# EAGLE board arduinoven (EAGLE 5.11)
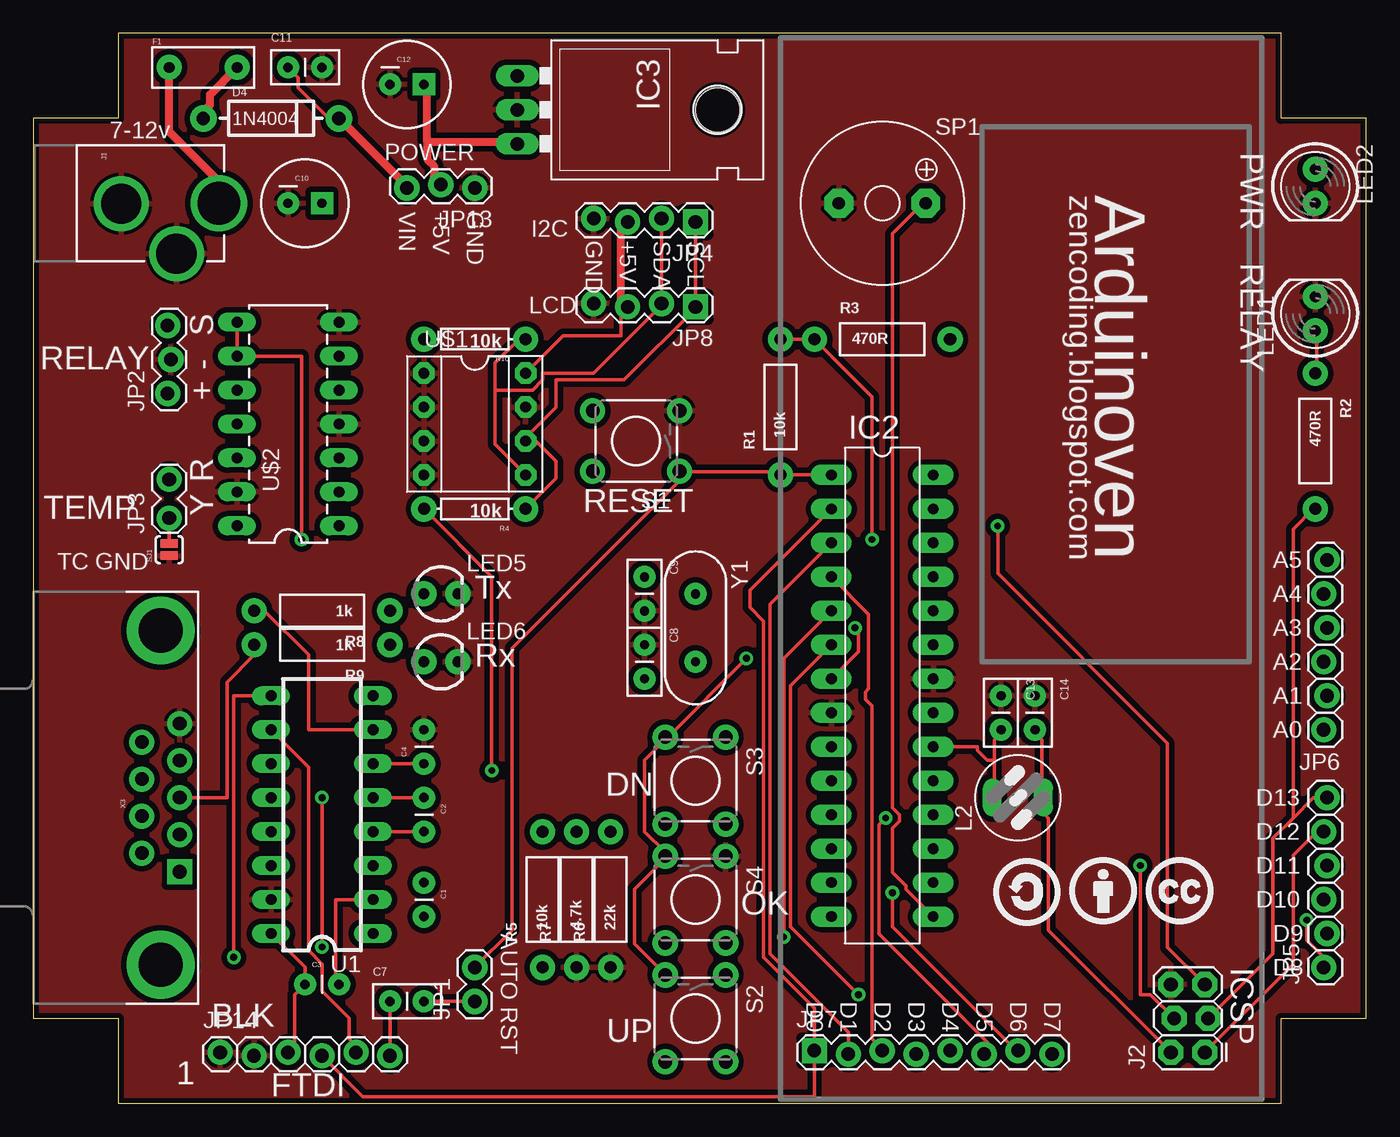
[diagram p0: board, top side]
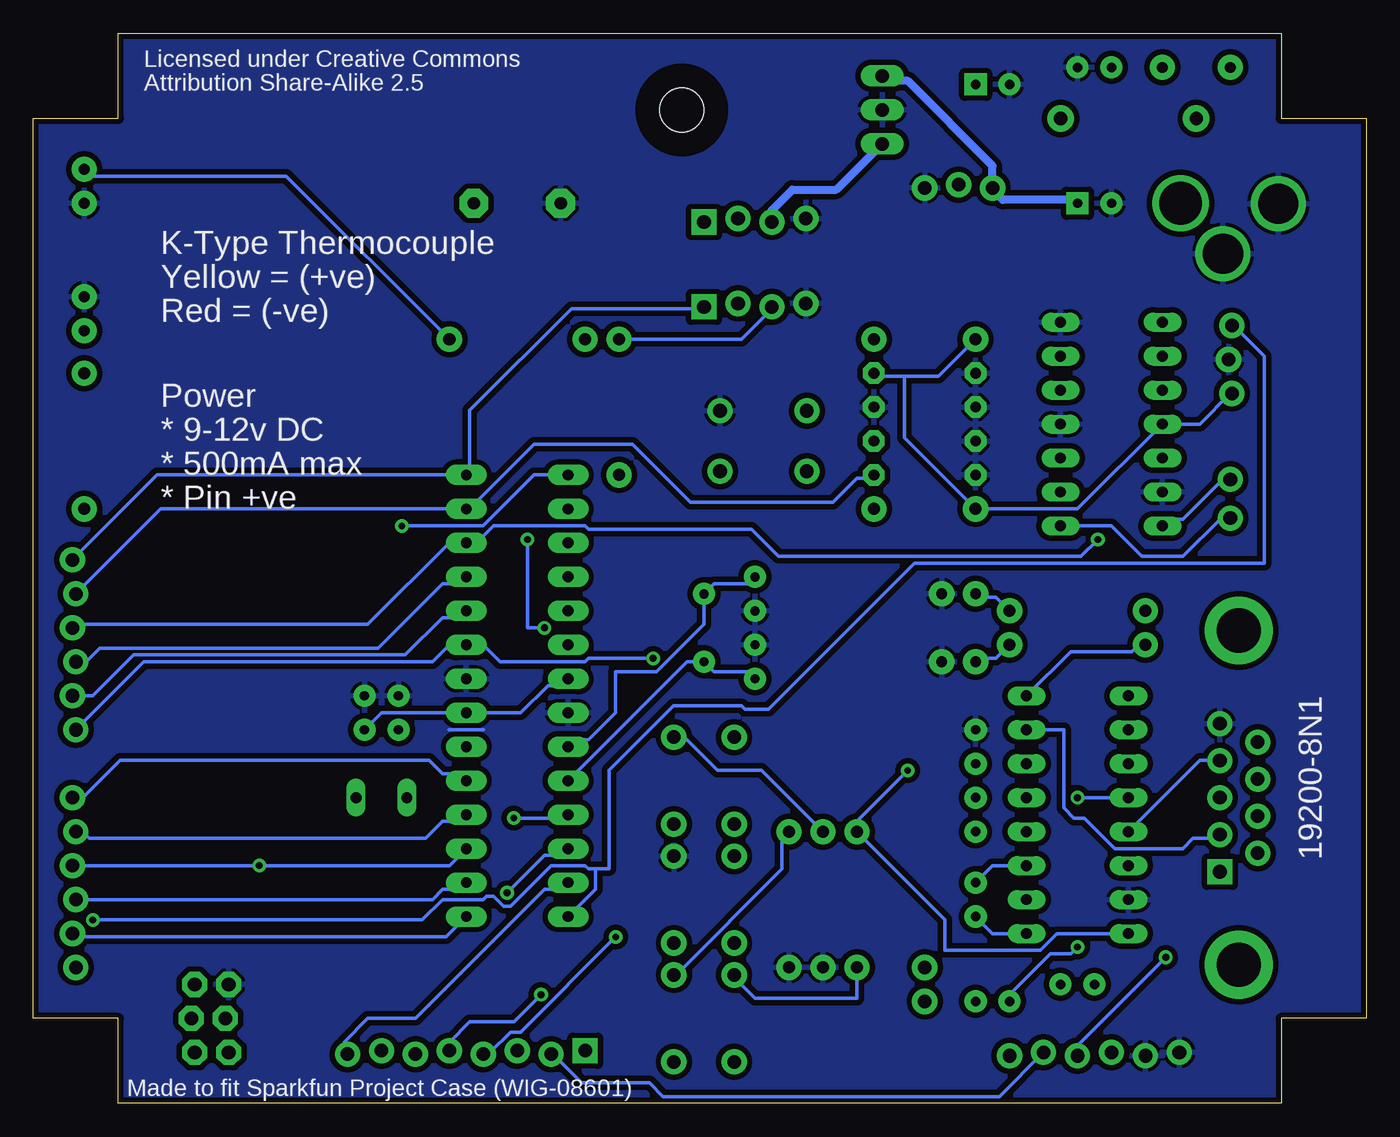
[diagram p1: board, bottom side, seen from below]

Size 99.69 x 80.01 mm. Coordinates in mm from the lower left corner, seen from the top.
Outline: 0,6.35 6.35,6.35 6.35,0 93.34,0 93.34,6.35 99.69,6.35 99.69,73.66 93.34,73.66 93.34,80.01 6.35,80.01 6.35,73.66 0,73.66 0,6.35
Copper layers (1*16): Top 0.035mm / dielectric 1.5mm / Bottom 0.035mm
Design rules "SparkFun *": minimum track width 10mil, minimum drill 20mil, track to track 10mil, track to pad 10mil, pad to pad 10mil, via to via 10mil, smd to smd 8mil, copper to edge 10mil, drill to drill 8mil, minimum pad ring 12mil, minimum via ring 10mil, stop-mask expansion 4mil, vias tented up to drill 25mil, thermal gap 10mil
Net classes: 1 power: width 0.61 mm

## Footprints (pad centres in the part's own frame; a part is rotated, then mirrored left to right if it is on the bottom)
CAP-PTH-SMALL = drill 0.7 pad 1.651 round: 1 0,0; 2 2.54,0
CAP-PTH-SMALL2 = drill 0.7 pad 1.651 round: 1 0,0; 2 2.54,0
CPOL-RADIAL-100UF-25V = drill 0.7 pad 1.651 square: 1 1.27,0 | drill 0.7 pad 1.651 round: 2 -1.27,0
DIODE-1N4001 = drill 1 pad 1.981 round: A -5.08,0; C 5.08,0
PTC = drill 0.8 pad 1.88 round: P$1 -2.54,0; P$2 2.54,0
ATMEL_DIL28-3 = drill 0.813 pad 1.524 long: 1 -16.51,-3.81; 2 -13.97,-3.81; 3 -11.43,-3.81; 4 -8.89,-3.81; 5 -6.35,-3.81; 6 -3.81,-3.81; 7 -1.27,-3.81; 8 1.27,-3.81; 9 3.81,-3.81; 10 6.35,-3.81; 11 8.89,-3.81; 12 11.43,-3.81; 13 13.97,-3.81; 14 16.51,-3.81; 15 16.51,3.81; 16 13.97,3.81; 17 11.43,3.81; 18 8.89,3.81; 19 6.35,3.81; 20 3.81,3.81; 21 1.27,3.81; 22 -1.27,3.81; 23 -3.81,3.81; 24 -6.35,3.81; 25 -8.89,3.81; 26 -11.43,3.81; 27 -13.97,3.81; 28 -16.51,3.81
TO-220-ALT = drill 1.016 long: GND 0,-3.81; IN -2.54,-3.81; OUT 2.54,-3.81 | hole 3.302: 0,11.176
POWER_JACK_PTH_LOCK = drill 2.997 pad 4.115 round: GND 0.025,6.557; GNDBREAK 3.762,10.7 | drill 3.2 pad 4.115 round: PWR 0,13.878
2X3_LOCK = drill 1.016 pad 1.88 octagon: 1 0,0; 2 0,2.54; 3 2.54,-0.254; 4 2.54,2.286; 5 5.08,0; 6 5.08,2.54
1X02 = drill 1.016 pad 1.88 round: 1 0,0; 2 2.54,0
1X03_LOCK = drill 1.016 pad 1.88 round: 1 0,0.127; 2 2.54,-0.127; 3 5.08,0.127
1X02_LOCK = drill 1.016 pad 1.88 round: 1 -0.178,0; 2 2.718,0
1X04_LOCK = drill 1.016 pad 1.88 square: 1 0,0.127 | drill 1.016 pad 1.88 round: 2 2.54,-0.127; 3 5.08,0.127; 4 7.62,-0.127
1X06_LOCK = drill 1.016 pad 1.88 round: 1 0,0; 2 2.54,-0.254; 3 5.08,0; 4 7.62,-0.254; 5 10.16,0; 6 12.7,-0.254
1X08_LOCK = drill 1.016 pad 1.88 square: 1 0,0.127 | drill 1.016 pad 1.88 round: 2 2.54,-0.127; 3 5.08,0.127; 4 7.62,-0.127; 5 10.16,0.127; 6 12.7,-0.127; 7 15.24,0.127; 8 17.78,-0.127
82114R = drill 0.813 long: 1 0,1.905; 2 0,-1.905
LED5MM = drill 0.813 pad 1.88 round: A -1.27,0; K 1.27,0
LED3MM = drill 0.813 pad 1.88 round: A -1.27,0; K 1.27,0
AXIAL-0.4 = drill 0.9 pad 1.88 round: P$1 -5.08,0; P$2 5.08,0
AXIAL-0.3 = drill 0.9 pad 1.88 round: P$1 -3.81,0; P$2 3.81,0
TACTILE-PTH = drill 1.016 pad 1.88 round: 1 -3.251,2.261; 2 3.251,2.261; 3 -3.251,-2.261; 4 3.251,-2.261
SJ_2S-NO = smd 0.635 x 1.27: 1 -0.45,0; 2 0.45,0
KSS1201 = drill 0.914 pad 2.159 octagon: + 3.251,0; - -3.251,0
DIL16 = drill 0.813 long: 1 -8.89,-3.81; 2 -6.35,-3.81; 3 -3.81,-3.81; 4 -1.27,-3.81; 5 1.27,-3.81; 6 3.81,-3.81; 7 6.35,-3.81; 8 8.89,-3.81; 9 8.89,3.81; 10 6.35,3.81; 11 3.81,3.81; 12 1.27,3.81; 13 -1.27,3.81; 14 -3.81,3.81; 15 -6.35,3.81; 16 -8.89,3.81
DIL08 = drill 0.813 pad 1.6 octagon: 1 -3.81,-3.81; 2 -1.27,-3.81; 3 1.27,-3.81; 4 3.81,-3.81; 5 3.81,3.81; 6 1.27,3.81; 7 -1.27,3.81; 8 -3.81,3.81
DIL14 = drill 0.813 long: 1 -8.89,-3.81; 2 -6.35,-3.81; 3 -3.81,-3.81; 4 -1.27,-3.81; 5 1.27,-3.81; 6 3.81,-3.81; 7 6.35,-3.81; 8 6.35,3.81; 9 3.81,3.81; 10 1.27,3.81; 11 -1.27,3.81; 12 -3.81,3.81; 13 -6.35,3.81; 14 -8.89,3.81
DB9 = drill 1.016 pad 1.88 square: 1 -5.54,-1.42 | drill 1.016 pad 1.88 round: 2 -2.77,-1.42; 3 0,-1.42; 4 2.77,-1.42; 5 5.54,-1.42; 6 -4.15,1.42; 7 -1.38,1.42; 8 1.38,1.42; 9 4.15,1.42 | drill 3.302 pad 5.08 round: G1 -12.5,0; G2 12.5,0
HC49US = drill 0.7 pad 1.651 round: 1 -2.54,0; 2 2.54,0

## Placement (x,y rotation side)
C1  0.1uF  [CAP-PTH-SMALL]  29.21,16.51 270 top
C2  0.1uF  [CAP-PTH-SMALL]  29.21,22.86 270 top
C3  0.1uF  [CAP-PTH-SMALL]  20.32,8.89 0 top
C4  0.1uF  [CAP-PTH-SMALL]  29.21,25.4 90 top
C7  0.1uF  [CAP-PTH-SMALL2]  26.67,7.62 0 top
C8  22pF  [CAP-PTH-SMALL2]  45.72,34.29 270 top
C9  22pF  [CAP-PTH-SMALL2]  45.72,39.37 270 top
C10  100uF  [CPOL-RADIAL-100UF-25V]  20.32,67.31 0 top
C11  0.1uF  [CAP-PTH-SMALL2]  19.05,77.47 0 top
C12  100uF  [CPOL-RADIAL-100UF-25V]  27.94,76.2 0 top
C13  0.1uF  [CAP-PTH-SMALL2]  72.39,30.48 270 top
C14  0.1uF  [CAP-PTH-SMALL2]  74.93,30.48 270 top
D4  1N4004  [DIODE-1N4001]  17.78,73.66 0 top
F1  500mA  [PTC]  12.7,77.47 0 top
IC2  ATMEGA328p  [ATMEL_DIL28-3]  63.5,30.48 270 top
IC3  7805  [TO-220-ALT]  40.01,74.3 270 top
J1  POWER_JACK  [POWER_JACK_PTH_LOCK]  0,67.31 270 top
J2  ICSP  [2X3_LOCK]  87.63,3.81 90 top
JP1  AUTO RST  [1X02]  33.02,7.62 90 top
JP2  RELAY  [1X03_LOCK]  10.16,53.09 90 top
JP3  TEMP  [1X02_LOCK]  10.16,43.94 90 top
JP4  I2C  [1X04_LOCK]  49.53,66.04 180 top
JP5  D8-D13  [1X06_LOCK]  96.52,10.16 90 top
JP6  A0-A5  [1X06_LOCK]  96.52,27.94 90 top
JP7  D0-D7  [1X08_LOCK]  58.42,3.81 0 top
JP8  LCD  [1X04_LOCK]  49.53,59.69 180 top
JP13  [1X03_LOCK]  33.02,68.58 180 top
JP14  FTDI  [1X06_LOCK]  13.97,3.81 0 top
L2  100uH  [82114R]  73.66,22.86 90 top
LED1  RELAY  [LED5MM]  95.89,59.05 90 top
LED2  PWR  [LED5MM]  95.89,68.58 270 top
LED5  Tx  [LED3MM]  30.48,38.1 0 top
LED6  Rx  [LED3MM]  30.48,33.02 0 top
R1  10k  [AXIAL-0.4]  55.88,52.07 90 top
R2  470R  [AXIAL-0.4]  95.89,49.53 270 top
R3  470R  [AXIAL-0.4]  63.5,57.15 0 top
R4  10k  [AXIAL-0.3]  33.02,44.45 180 top
R5  10k  [AXIAL-0.4]  38.1,15.24 90 top
R6  22k  [AXIAL-0.4]  43.18,15.24 90 top
R7  4.7k  [AXIAL-0.4]  40.64,15.24 90 top
R8  1k  [AXIAL-0.4]  21.59,36.83 180 top
R9  1k  [AXIAL-0.4]  21.59,34.29 180 top
R10  10k  [AXIAL-0.3]  33.02,57.15 180 top
S1  RESET  [TACTILE-PTH]  45.09,49.53 180 top
S2  UP  [TACTILE-PTH]  49.53,6.35 270 top
S3  DOWN  [TACTILE-PTH]  49.53,24.13 270 top
S4  ENTER  [TACTILE-PTH]  49.53,15.24 270 top
SJ1  GND_TC  [SJ_2S-NO]  10.16,41.4 90 top
SP1  PIEZO  [KSS1201]  63.5,67.31 0 top
U1  MAX232PTH  [DIL16]  21.59,21.59 90 top
U$1  24LC256  [DIL08]  33.02,50.8 270 top
U$2  AD595  [DIL14]  19.05,52.07 90 top
U$4  [BY]  77.47,13.34 0 top
U$5  [CC]  83.19,13.34 0 top
U$6  [SA]  71.75,13.34 0 top
X3  DB9-Female  [DB9]  9.53,22.86 90 top
Y1  16MHz  [HC49US]  49.53,35.56 270 top

## Library data of the parts
C1-C4 C7-C14 D4 F1 IC3 J1 JP1-JP8 JP13 JP14 LED1 LED2 LED5 LED6 R1-R10 S1-S4 SJ1 U1 X3 Y1 = SparkFun
IC2 J2 L2 U$1 U$2 U$4-U$6 = zencoding
SP1 = buzzer; OC_FARNELL: unknown; OC_NEWARK: unknown

## Nets
ADC0/PC0: IC2.23 JP6.1 R5.P$1 S2.3 S3.3 S4.3
ADC1/PC1: IC2.24 JP6.2
ADC2/PC2: IC2.25 JP6.3
ADC3/PC3: IC2.26 JP6.4 U$2.8 U$2.9
AIN0/PD6: IC2.12 JP7.7
AIN1/PD7: IC2.13 JP7.8
GND: C4.2 C8.1 C9.2 C10.2 C11.2 C12.2 C13.1 C14.1 IC2.8 IC2.22 IC3.GND J1.GND J1.GNDBREAK J2.6 JP2.2 JP4.4 JP8.4 JP13.1 JP14.1 JP14.2 LED1.K LED2.K LED5.K LED6.K R6.P$1 R7.P$1 S1.3 S4.1 SJ1.1 SP1.- U1.15 U$1.1 U$1.2 U$1.3 U$1.4 U$1.7 U$2.4 U$2.7 U$2.13 X3.5
I2C/SCL: IC2.28 JP4.1 JP6.6 JP8.1 R4.P$1 U$1.6
I2C/SDA: IC2.27 JP4.2 JP6.5 JP8.2 R10.P$1 U$1.5
ICP/PB0: IC2.14 JP2.3 JP5.1
INT0/PD2: IC2.4 JP7.3
INT1/PD3: IC2.5 JP7.4
M8RESET: C7.1 JP14.6 U1.12
M8RXD: IC2.2 JP7.1 JP14.4 U1.9
M8TXD: IC2.3 JP7.2 JP14.5 U1.10
MISO/PB4: IC2.18 J2.1 JP5.5
MOSI/PB3: IC2.17 J2.4 JP5.4
N$1: LED1.A R2.P$1
N$2: IC2.1 J2.5 JP1.2 R1.P$1 S1.1
N$5: LED2.A R3.P$2
N$6: R6.P$2 S2.1
N$7: R7.P$2 S3.1
N$9: F1.P$1 J1.PWR
N$10: D4.A F1.P$2
N$11: C1.2 U1.1
N$19: C7.2 JP1.1
N$20: C8.2 IC2.10 Y1.2
N$21: C9.1 IC2.9 Y1.1
N$23: C13.2 IC2.20 L2.1
N$24: C1.1 U1.3
N$25: C2.2 U1.4
N$26: C2.1 U1.5
N$27: C4.1 U1.6
N$28: C3.2 U1.2
N$29: U1.13 X3.4
N$30: R9.P$2 U1.8 X3.3
N$31: R8.P$2 U1.7 X3.2
N$32: LED5.A R8.P$1
N$33: LED6.A R9.P$1
OC1/PB1: IC2.15 JP5.2 SP1.+
SCK/PB5: IC2.19 J2.3 JP5.6 R2.P$2
SS/PB2: IC2.16 JP5.3
T0/PD4: IC2.6 JP7.5
T1/PD5: IC2.11 JP7.6
TC/+IN: JP3.1 SJ1.2 U$2.1
TC/-IN: JP3.2 U$2.14
VCC: C3.1 C12.1 C14.2 IC2.7 IC2.21 IC3.OUT J2.2 JP2.1 JP4.3 JP8.3 JP13.2 JP14.3 L2.2 R1.P$2 R3.P$1 R4.P$2 R5.P$2 R10.P$2 U1.16 U$1.8 U$2.11
VIN: C10.1 C11.1 D4.C IC3.IN JP13.3

## Tracks (layer width: path | path; a pad name or v marks a point on that pad's centre or on a via)
ADC0/PC0  (via drill 0.51)
  Top 0.254: S2.3 47.24,9.65 44.96,11.94 44.96,16 47.24,18.29 S4.3 47.24,18.54 47.24,18.8 45.72,20.32 45.72,25.65 47.24,27.18 S3.3 47.5,27.43 v53.34,33.27
  Bottom 0.254: R5.P$1 38.1,7.87 45.72,7.87 47.24,9.4 S2.3 | v53.34,33.27 58.17,33.27 58.42,33.02 64.77,33.02 66.04,34.29 IC2.23 68.58,34.29 69.85,33.02 91.44,33.02 JP6.1
ADC1/PC1
  Bottom 0.254: IC2.24 67.82,36.32 69.09,36.32 71.88,33.53 92.2,33.53 95.25,30.48 JP6.2
ADC2/PC2
  Bottom 0.254: IC2.25 67.82,38.86 69.09,38.86 73.91,34.04 94.74,34.04 95.76,33.02 JP6.3
ADC3/PC3  (via drill 0.51)
  Top 0.254: U$2.8 U$2.9 20.07,55.88 v20.07,42.16
  Bottom 0.254: JP6.4 96.52,35.81 74.68,35.81 68.58,41.91 IC2.26 66.55,41.91 65.28,43.18 58.42,43.18 58.17,42.93 45.97,42.93 43.94,40.89 21.34,40.89 v20.07,42.16
AIN0/PD6  (via drill 0.51)
  Top 0.254: v64.26,15.75 64.26,13.21 73.66,3.81 JP7.7
  Bottom 0.254: IC2.12 60.2,18.54 61.47,18.54 v64.26,15.75
AIN1/PD7
  Bottom 0.254: IC2.13 60.2,16 61.47,16 71.12,6.35 74.68,6.35 76.45,4.57 76.45,3.81 76.2,3.81 JP7.8
GND
  Bottom 0.254: 66.03,27.94 66.04,27.94 68.58,27.94 68.59,27.94
  pour Bottom (isolate 0.406): 0,73.66 6.35,73.66 6.35,80.01 93.34,80.01 93.34,73.66 99.69,73.66 99.69,6.35 93.34,6.35 93.34,0 6.35,0 6.35,6.35 0,6.35
  pour Top (isolate 0.406): 0,73.66 6.35,73.66 6.35,80.01 93.34,80.01 93.34,73.66 99.69,73.66 99.69,6.35 93.34,6.35 93.34,0 6.35,0 6.35,6.35 0,6.35
I2C/SCL
  Top 0.254: JP4.1 JP8.1 49.53,59.44 44.2,54.1 39.12,54.1 39.12,52.07 37.08,50.04 | 37.08,50.04 36.83,49.78 U$1.6 37.08,50.04 | R4.P$1 39.12,46.74 39.12,48.01 37.08,50.04
  Bottom 0.254: JP6.6 90.42,46.99 IC2.28 67.06,46.99 67.06,51.82 59.44,59.44 49.53,59.44 JP8.1
I2C/SDA
  Top 0.254: JP4.2 JP8.2 46.99,59.69 41.91,54.61 38.1,54.61 38.1,54.1 37.34,53.34 34.54,53.34 | U$1.5 34.54,49.28 34.54,53.34 | 34.54,53.34 34.54,55.37 36.32,57.15 R10.P$1
  Bottom 0.254: JP6.5 90.17,44.45 IC2.27 67.06,44.45 62.23,49.28 54.86,49.28 50.55,44.96 39.88,44.96 38.1,46.74 37.08,46.74 U$1.5
ICP/PB0  (via drill 0.51)
  Top 0.254: v95.25,13.72 95.25,12.19 96.52,10.92 JP5.1
  Bottom 0.254: IC2.14 57.66,16 57.66,17.53 | 57.66,17.53 58.17,17.53 58.42,17.78 60.96,17.78 64.01,14.73 64.52,14.73 65.28,15.49 65.79,15.49 66.04,15.24 69.09,15.24 70.61,13.72 v95.25,13.72 | 57.66,17.53 56.64,17.53 56.64,24.89 51.82,29.72 46.74,29.72 46.48,29.46 44.7,29.46 33.78,40.39 7.62,40.39 7.62,55.88 9.91,58.17 JP2.3
INT0/PD2
  Top 0.254: IC2.4 62.48,36.58 62.48,30.99 62.23,30.73 62.23,30.23 62.74,29.72 62.74,4.83 63.5,4.06 JP7.3
INT1/PD3  (via drill 0.51)
  Top 0.254: IC2.5 56.13,33.27 v56.13,12.45
  Bottom 0.254: v56.13,12.45 63.25,5.33 64.01,5.33 65.53,3.81 66.04,3.81 JP7.4
M8RESET  (via drill 0.51)
  Top 0.254: v21.59,11.68 v21.59,22.86 | JP14.6 C7.1
  Bottom 0.254: v21.59,22.86 U1.12 | v21.59,11.68 22.1,11.18 23.62,11.18 26.67,8.13 C7.1
M8RXD  (via drill 0.51)
  Top 0.254: U1.9 14.99,30.48 v14.99,10.92 | IC2.2 53.59,38.35 53.59,37.08 54.61,36.07 54.61,10.92 58.42,7.11 JP7.1 58.42,0.51 24.64,0.51 JP14.4
  Bottom 0.254: v14.99,10.92 21.59,4.32 JP14.4
M8TXD
  Top 0.254: U1.10 20.57,25.15 20.57,11.43 21.59,10.41 21.59,8.38 23.62,6.35 23.62,4.83 24.13,4.32 JP14.5 | IC2.3 55.12,37.34 55.12,11.18 60.96,5.33 JP7.2
  Bottom 0.254: JP14.5 27.43,0.51 52.58,0.51 53.59,1.52 58.67,1.52 60.71,3.56 60.96,3.56 JP7.2
MISO/PB4
  Top 0.254: J2.1 94.23,10.41 94.23,18.54 96.01,20.32 JP5.5
  Bottom 0.254: IC2.18 67.82,21.08 69.09,21.08 70.36,19.81 95.5,19.81 96.01,20.32 JP5.5
MOSI/PB3  (via drill 0.51)
  Top 0.254: J2.4 83.57,8.13 82.8,8.13 v82.8,17.78
  Bottom 0.254: IC2.17 68.58,17.78 v82.8,17.78 JP5.4
N$1
  Top 0.254: R2.P$1 96.01,54.61 96.01,57.66 LED1.A
N$2  (via drill 0.51)
  Top 0.254: IC2.1 R1.P$1 55.88,47.24 48.51,47.24 S1.1 48.26,47.24 48.26,46.48 35.81,34.04 35.81,12.95 JP1.2 | J2.5 84.84,11.68 84.84,26.92 72.14,39.62 v72.14,43.18
  Bottom 0.254: v72.14,43.18 66.04,43.18 62.23,46.99 IC2.1
N$5
  Bottom 0.254: R3.P$2 80.77,69.34 95.25,69.34 95.76,69.85 LED2.A
N$6
  Bottom 0.254: R6.P$2 43.69,20.32 43.69,17.53 51.56,9.65 S2.1
N$7
  Bottom 0.254: R7.P$2 45.21,24.89 48.51,24.89 50.8,27.18 51.56,27.18 S3.1
N$9
  Top 0.254: J1.PWR 13.72,67.31
  Top 0.61: F1.P$1 10.16,72.64 13.72,69.09 13.72,67.31
N$10
  Top 0.61: F1.P$2 13.21,75.44 13.21,74.68 12.7,74.17 D4.A
N$11
  Bottom 0.254: U1.1 27.94,12.7 C1.2
N$19
  Top 0.254: C7.2 JP1.1
N$20
  Bottom 0.254: IC2.10 50.8,33.02 Y1.2 48.77,32.26 46.23,32.26 C8.2
N$21
  Bottom 0.254: IC2.9 59.18,27.18 58.17,27.18 56.13,29.21 56.13,32.26 53.09,32.26 49.53,35.81 Y1.1 48.77,38.86 46.23,38.86 C9.1
N$23
  Top 0.254: 71.88,25.65 71.88,27.18 72.39,27.69 C13.2 | 71.88,25.65 71.88,22.86 L2.1 | IC2.20 70.61,26.67 70.61,26.42 71.37,25.65 71.88,25.65
N$24
  Bottom 0.254: U1.3 27.94,17.78 C1.1
N$25
  Top 0.254: U1.4 C2.2
N$26
  Top 0.254: U1.5 C2.1
N$27
  Top 0.254: U1.6 C4.1
N$28
  Top 0.254: U1.2 22.61,15.24 22.61,9.14 C3.2
N$29
  Bottom 0.254: U1.13 12.45,25.65 11.18,25.65 X3.4
N$30
  Top 0.254: R9.P$2 16.51,33.53 14.48,31.5 14.48,22.86 X3.3
  Bottom 0.254: U1.8 22.1,33.78 17.53,33.78 17.02,34.29 R9.P$2
N$31
  Top 0.254: U1.7 20.57,27.94 20.57,33.53 17.27,36.83 R8.P$2
  Bottom 0.254: U1.7 22.61,27.94 22.61,22.1 21.84,21.34 21.08,21.34 18.8,19.05 13.72,19.05 12.95,19.81 11.43,19.81 11.18,20.07 X3.2
N$32
  Bottom 0.254: R8.P$1 27.69,37.85 28.96,37.85 LED5.A
N$33
  Bottom 0.254: R9.P$1 27.69,33.27 28.96,33.27 LED6.A
OC1/PB1
  Top 0.254: IC2.15 65.28,16 65.28,16.26 64.26,17.27 64.26,20.57 64.77,21.08 64.77,21.59 64.26,22.1 64.26,65.02 66.55,67.31 SP1.+
  Bottom 0.254: IC2.15 68.83,12.45 96.52,12.45 JP5.2
SCK/PB5
  Top 0.254: J2.3 92.71,11.18 92.71,19.81 94.23,21.34 | 94.23,21.34 95.76,22.86 JP5.6 | 94.23,21.34 94.23,42.93 95.76,44.45 R2.P$2
  Bottom 0.254: IC2.19 67.82,24.64 69.09,24.64 70.1,25.65 93.22,25.65 96.01,22.86 JP5.6
SS/PB2
  Bottom 0.254: IC2.16 67.82,16 69.09,16 69.85,15.24 JP5.3
T0/PD4  (via drill 0.51)
  Top 0.254: IC2.6 56.64,31.24 56.64,13.21 v61.72,8.13
  Bottom 0.254: v61.72,8.13 63.75,6.1 67.06,6.1 68.58,4.57 JP7.5
T1/PD5  (via drill 0.51)
  Top 0.254: v63.75,21.34 63.25,20.83 63.25,12.7 71.37,4.57 71.37,4.06 71.12,3.81 JP7.6
  Bottom 0.254: IC2.11 59.94,21.34 v63.75,21.34
TC/+IN
  Top 0.254: SJ1.2 JP3.1
  Bottom 0.254: U$2.1 19.05,43.18 16.76,40.89 13.72,40.89 10.92,43.69 10.16,43.69 JP3.1
TC/-IN
  Bottom 0.254: U$2.14 14.73,43.69 13.72,43.69 10.92,46.48 10.16,46.48 JP3.2
VCC  (via drill 0.51)
  Top 0.254: U1.16 20.32,10.16 C3.1 19.56,8.13 19.56,4.32 JP14.3 | C14.2 74.93,27.69 75.44,27.18 75.44,22.86 L2.2 75.69,22.86 75.69,21.59 75.95,21.34 75.95,12.95 J2.2 | 29.46,75.95 C12.1 | 30.48,68.83 JP13.2 | IC3.OUT 36.07,71.88 | R1.P$2 R3.P$1 62.74,52.83 v62.74,42.16 | v61.47,35.56 61.72,35.31 61.72,33.78 IC2.7 | U$1.8 39.62,57.4 43.94,57.4 43.94,58.93 44.45,59.44 JP8.3 44.45,59.69 | 44.45,65.79 JP4.3 | R4.P$2 34.29,39.37 v34.29,24.89
  Top 0.61: 29.46,71.88 29.46,70.61 29.97,70.1 29.97,69.34 30.48,68.83 | 29.46,71.88 29.46,75.95 | 36.07,71.88 29.46,71.88 | 44.45,59.69 43.94,60.2 43.94,65.28 44.45,65.79
  Bottom 0.254: U1.16 23.11,12.7 24.38,11.43 31.5,11.43 31.5,13.72 R5.P$2 38.1,21.08 v34.29,24.89 | IC2.7 60.2,31.24 61.21,31.24 63.25,29.21 IC2.21 73.66,29.21 C14.2 | v62.74,42.16 62.74,35.56 v61.47,35.56 | R1.P$2 46.74,57.15 44.45,59.44 JP8.3 | JP2.1 10.16,53.09 12.45,50.8 U$2.11 21.59,44.45 R4.P$2 34.54,49.78 34.54,54.36 | 34.54,54.36 36.58,54.36 U$1.8 | R10.P$2 32,54.36 34.54,54.36
  Bottom 0.61: IC3.OUT 39.62,68.33 42.93,68.33 44.45,66.8 JP4.3
VIN
  Top 0.254: JP13.3 27.94,68.58 | C11.1 19.81,76.71 19.81,75.95 22.1,73.66 D4.C
  Top 0.61: 27.94,68.58 D4.C
  Bottom 0.254: 27.94,68.33 JP13.3
  Bottom 0.61: C10.1 21.84,67.56 27.18,67.56 27.94,68.33 | IC3.IN 35.81,76.45 34.29,76.45 27.94,70.1 JP13.3

## Text on the board
tPlace: 7-12v | POWER | zencoding.blogspot.com | Arduinoven | VIN | +5V | GND | GND | +5V | SDA | SCL | S | RELAY | - | + | R | RESET | TEMP | Y | TC GND | A5 | A4 | A3 | A2 | A1 | A0 | DN | D13 | D12 | D11 | OK | D10 | D9 | D8 | D0 | D1 | D2 | D3 | D4 | D5 | D6 | D7 | BLK | UP | 1
bPlace: Licensed under Creative Commons | Attribution Share-Alike 2.5 | K-Type Thermocouple | Yellow = (+ve) | Red = (-ve) | Power | * 9-12v DC | * 500mA max | * Pin +ve | 19200-8N1 | Made to fit Sparkfun Project Case (WIG-08601)